# Allegro board VGroupV_PCB.brd
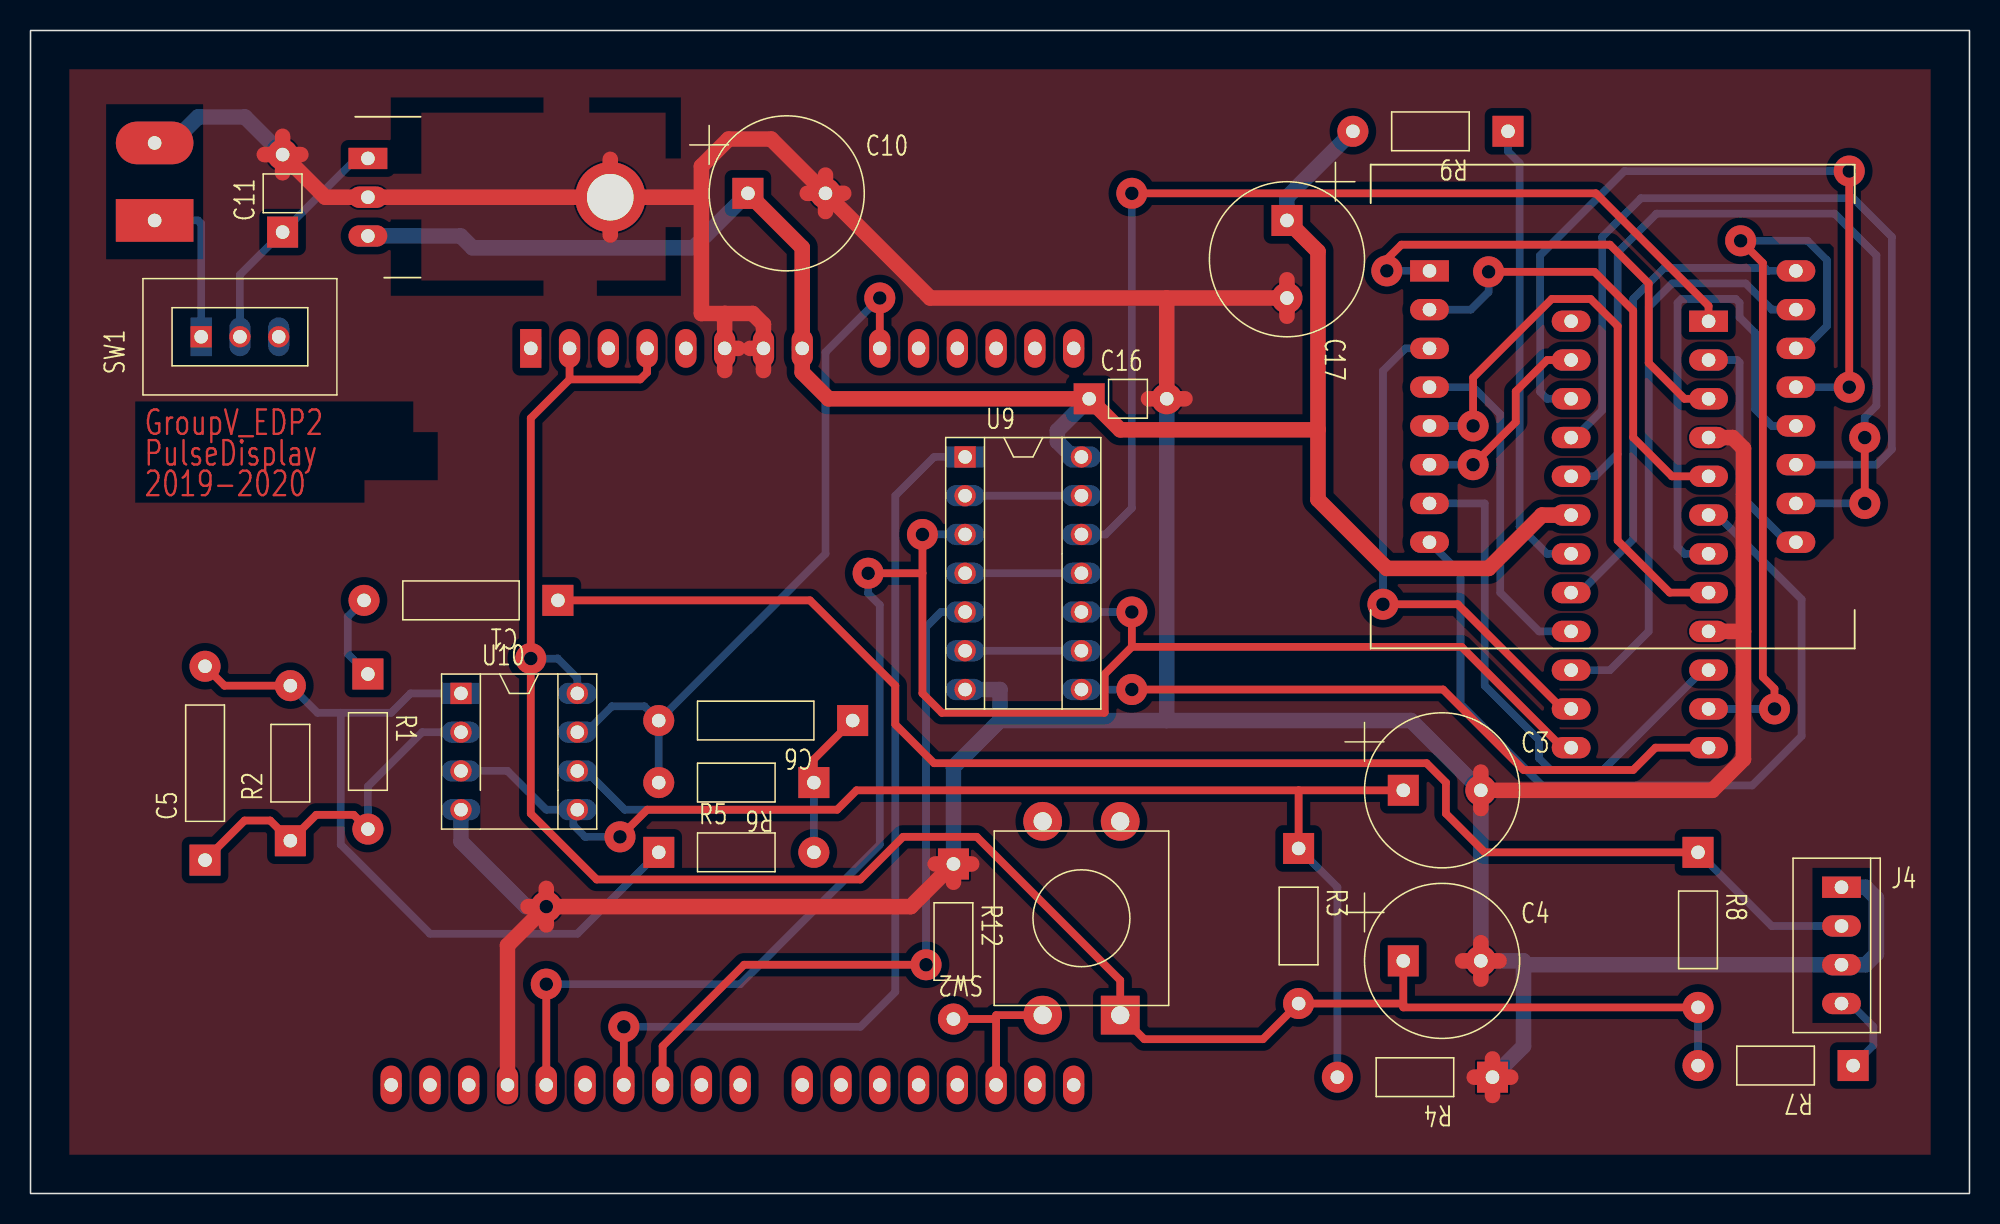
[diagram p0: board, top side]
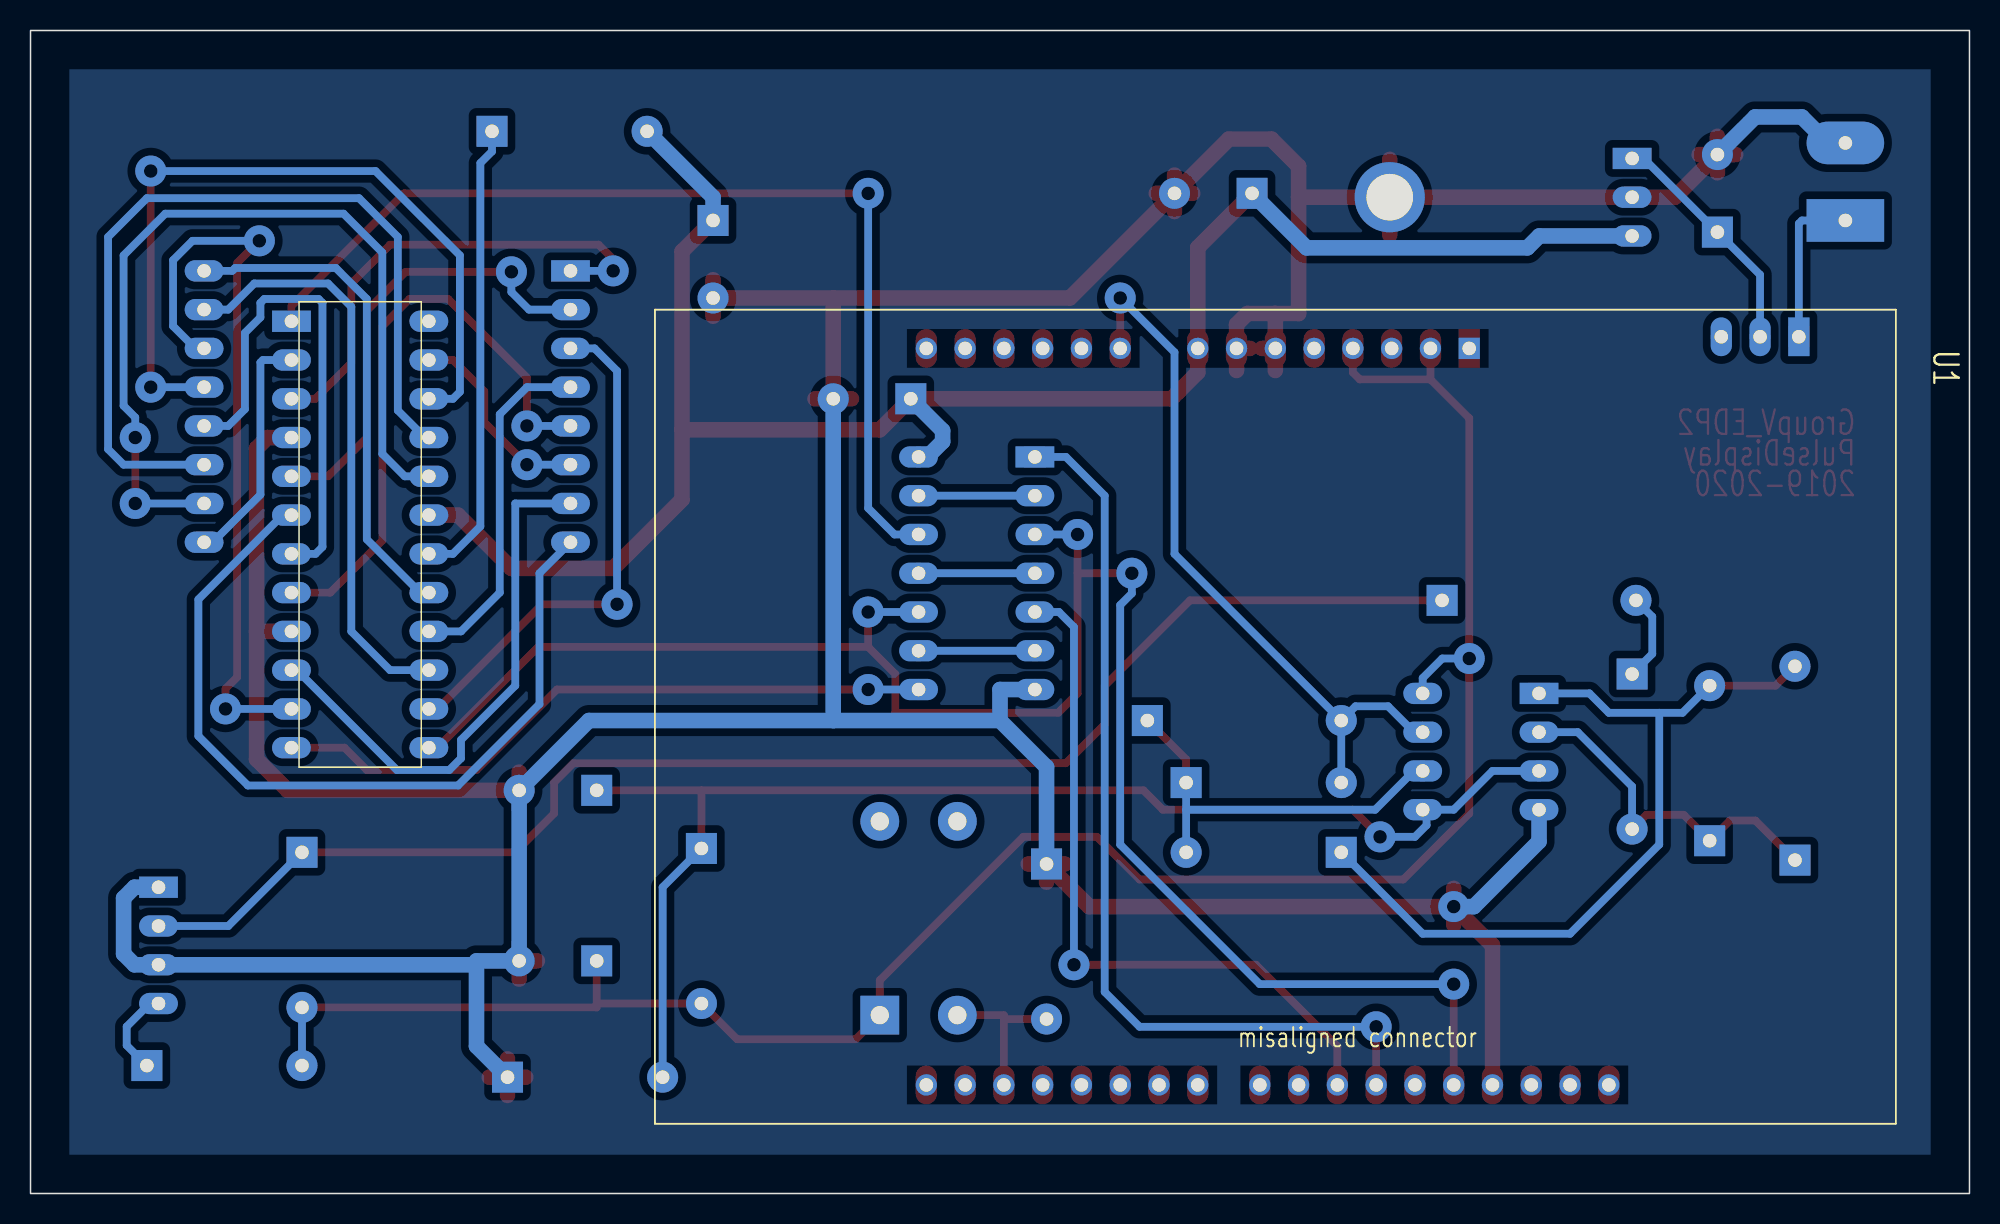
[diagram p1: board, bottom side, seen from below]

Outline 127 x 76.2 mm; copper layers: TOP, BOTTOM. Coordinates in mm from the lower left corner of the outline.
Outline path: rectangle 0,0 127,76.2

## Design rules (mm)
constraint set DEFAULT: min track width 0.508
nets with their own width: min track width 1.016; nets GND VCC

## Placement (name value [footprint] x y rotation side)
C1  1u  [GU-RC500]  34.54 38.86 180 top
C3  220U  [GU-CAPCYL200]  89.92 26.42 0 top
C4  220U  [GU-CAPCYL200]  89.92 15.24 0 top
C5  1n  [GU-RC500]  11.43 21.84 90 top
C6  1n  [GU-RC500]  53.85 30.99 180 top
C10  220u  [GU-CAPCYL200]  46.99 65.53 0 top
C11  0.1u  [GU-RC200]  16.51 62.99 90 top
C16  0.1u  [GU-RC200]  69.34 52.07 0 top
C17  10u  [GU-CAPCYL200]  82.3 63.75 270 top
DN1  LedArr-8x8  [8X8-LED-TRUOPTO]  103.63 51.56 270 top
J1  BATTERY 9V  [GU-TERMINAL2-200]  8.13 63.75 180 top
J4  CON4  [GU-MOLEX4]  118.62 20.07 0 top
R1  10k  [GU-RC400]  22.1 34.04 270 top
R2  50k  [GU-RC400]  17.02 23.11 90 top
R3  100k  [GU-RC400]  83.06 22.61 270 top
R4  100k  [GU-RC400]  95.76 7.62 180 top
R5  1k  [GU-RC400]  41.15 22.35 0 top
R6  50k  [GU-RC400]  51.31 26.92 180 top
R7  100  [GU-RC400]  119.38 8.38 180 top
R8  10k  [GU-RC400]  109.22 22.35 270 top
R9  30k  [GU-RC400]  96.77 69.6 180 top
R12  3k3  [GU-RC400]  60.45 21.59 270 top
SW1  SW_SL_SPDT  [GU-SW-SLIDE-SPDT]  11.18 56.13 90 top
SW2  SW PUSHBUTTON-SPST-2/SM  [GU-PUSH52]  71.37 11.68 180 top
U1  FRDM-KL25Z-Arduino  [GU-FRDM-ARDUINO]  32.77 55.37 270 bottom
U5  LM2937  [GU-LM2937]  22.1 67.82 0 top
U8  MAX7221  [GU-DIP24]  105.41 43.18 180 bottom
U9  74HCT04  [GU-DIPSOCK14]  61.21 48.26 0 top
U10  MCP6292  [GU-DIPSOCK8]  28.19 32.77 0 top

## Library data of the parts
C1 C5 C6 = C
C3 C4 = C_elect_0
C10 C11 C16 C17 = CAPACITOR NON-POL
DN1 = LedArr-8x8
J1 = CON2: User Part Number: TERMINAL2-200
J4 = CON4
R1-R9 R12 = R
SW1 = SW_SL_SPDT
SW2 = SW PUSHBUTTON-SPST-2/SM_1
U1 = FRDM-KL25Z-Arduino
U5 = LM2937_0
U8 = MAX7221_7
U9 = 74HCT04
U10 = MCP6292

## Footprints (pads in the part's own frame, mm; a bottom-side part is the same pattern mirrored in y, then rotated)
8X8-LED-TRUOPTO
  rect 1.397x2.54 hole 0.889: 1(-8.89,-12)
  oval 1.397x2.54 hole 0.889: 2(-6.35,-12) 3(-3.81,-12) 4(-1.27,-12) 5(1.27,-12) 6(3.81,-12) 7(6.35,-12) 8(8.89,-12) 9(8.89,12) 10(6.35,12) 11(3.81,12) 12(1.27,12) 13(-1.27,12) 14(-3.81,12) 15(-6.35,12) 16(-8.89,12)
GU-CAPCYL200
  rect 2.032x2.032 hole 0.889: 1(0,0)
  round 2.032 hole 0.889: 2(5.08,0)
GU-DIP24
  rect 2.54x1.397 hole 0.889: 1(-4.5,13.97)
  oval 2.54x1.397 hole 0.889: 2(-4.5,11.43) 3(-4.5,8.89) 4(-4.5,6.35) 5(-4.5,3.81) 6(-4.5,1.27) 7(-4.5,-1.27) 8(-4.5,-3.81) 9(-4.5,-6.35) 10(-4.5,-8.89) 11(-4.5,-11.43) 12(-4.5,-13.97) 13(4.5,-13.97) 14(4.5,-11.43) 15(4.5,-8.89) 16(4.5,-6.35) 17(4.5,-3.81) 18(4.5,-1.27) 19(4.5,1.27) 20(4.5,3.81) 21(4.5,6.35) 22(4.5,8.89) 23(4.5,11.43) 24(4.5,13.97)
GU-DIPSOCK8
  rect 1.397x1.397 hole 0.889: 1(0,0)
  round 1.397 hole 0.889: 2(0,-2.54) 3(0,-5.08) 4(0,-7.62) 5(7.62,-7.62) 6(7.62,-5.08) 7(7.62,-2.54) 8(7.62,0)
GU-DIPSOCK14
  rect 1.397x1.397 hole 0.889: 1(0,0)
  round 1.397 hole 0.889: 2(0,-2.54) 3(0,-5.08) 4(0,-7.62) 5(0,-10.16) 6(0,-12.7) 7(0,-15.24) 8(7.62,-15.24) 9(7.62,-12.7) 10(7.62,-10.16) 11(7.62,-7.62) 12(7.62,-5.08) 13(7.62,-2.54) 14(7.62,0)
GU-FRDM-ARDUINO
  rect 2.54x1.397 hole 0.889: 1(0,0)
  oval 2.54x1.397 hole 0.889: 2(0,-2.54) 3(0,-5.08) 4(0,-7.62) 5(0,-10.16) 6(0,-12.7) 7(0,-15.24) 8(0,-17.78) 9(0,-22.86) 10(0,-25.4) 11(0,-27.94) 12(0,-30.48) 13(0,-33.02) 14(0,-35.56) 15(48.26,-35.56) 16(48.26,-33.02) 17(48.26,-30.48) 18(48.26,-27.94) 19(48.26,-25.4) 20(48.26,-22.86) 21(48.26,-20.32) 22(48.26,-17.78) 23(48.26,-13.716) 24(48.26,-11.176) 25(48.26,-8.636) 26(48.26,-6.096) 27(48.26,-3.556) 28(48.26,-1.016) 29(48.26,1.524) 30(48.26,4.064) 31(48.26,6.604) 32(48.26,9.144)
GU-LM2937
  rect 2.54x1.397 hole 0.889: 1(0,0)
  oval 2.54x1.397 hole 0.889: 2(0,-2.54) 3(0,-5.08)
  round 4.6 hole 3.05: 4(15.875,-2.54)
GU-MOLEX4
  rect 2.54x1.397 hole 0.889: 1(0,0)
  oval 2.54x1.397 hole 0.889: 2(0,-2.54) 3(0,-5.08) 4(0,-7.62)
GU-PUSH52
  rect 2.54x2.54 hole 1.194: 1(0,0)
  round 2.54 hole 1.194: 2(5.08,0) 3(0,-12.7) 4(5.08,-12.7)
GU-RC200
  rect 2.032x2.032 hole 0.889: 1(0,0)
  round 2.032 hole 0.889: 2(5.08,0)
GU-RC400
  rect 2.032x2.032 hole 0.889: 1(0,0)
  round 2.032 hole 0.889: 2(10.16,0)
GU-RC500
  rect 2.032x2.032 hole 0.889: 1(0,0)
  round 2.032 hole 0.889: 2(12.7,0)
GU-SW-SLIDE-SPDT
  rect 1.397x1.397 hole 0.889: 1(0,0)
  round 1.397 hole 0.889: 2(0,-2.54) 3(0,-5.08)
GU-TERMINAL2-200
  rect 5.08x2.794 hole 0.889: 1(0,0)
  oval 5.08x2.794 hole 0.889: 2(0,-5.08)

## Nets
3V3: C4.1 R3.2 R7.2 R8.2 SW2.1(4) U1.2 U1.4 U10.8
GND: C3.2(-) C4.2(-) C10.2 C11.2 C16.2 C17.2 J1.2 J4.1 J4.3 R4.1 R12.1 U1.6 U1.7 U1.29 U5.2 U5.4 U8.4 U8.9 U9.7 U10.4
VCC: C10.1 C16.1 C17.1 R9.2 U1.8 U5.3(OUT) U8.19(VCC) U9.14
VIN: C1.1 J4.2 R8.1
CS: U8.12 U9.8
LOAD: U1.25 U9.5
MOSI: U1.26 U9.1
SCLK: U1.28 U8.13 U9.3 U9.10
SDI: U8.1 U9.12(Y)
VOUT: C6.2 R6.2 U1.9 U10.7(OUT)
VREF: C3.1 R3.1 R4.2 U10.3 U10.5
N08137: C5.1 R1.2 R2.1 U10.2
N08145: C5.2 R2.2 R5.1 U10.1
N08157: C6.1 R5.2 R6.1 U10.6
N08433: C1.2 R1.1
N10280: J4.4 R7.1
N13184: U9.4 U9.11
N13188: U9.2 U9.13
N13195: U9.6 U9.9
N25169: DN1.16 U8.17
N25451: DN1.13 U8.22
N25464: DN1.3 U8.14
N25471: DN1.4 U8.16
N25478: DN1.10 U8.20
N25485: DN1.6 U8.23
N25492: DN1.11 U8.21
N25499: DN1.15 U8.15
N28309: J1.1 SW1.1
N28319: C11.1 SW1.2 U5.1
N29244: R12.2 SW2.2 U1.17
N68469: R9.1 U8.18
N1135613: DN1.9 U8.2
N1135614: DN1.14 U8.11
N1135615: DN1.8 U8.6
N1135616: DN1.12 U8.7
N1135617: DN1.1 U8.3
N1135618: DN1.7 U8.10
N1135619: DN1.2 U8.5
N1135620: DN1.5(RA8) U8.8

Pads without a net: SW1 3; SW2 3 4; U1 1 3 5 10 11 12 13 14 15 16 18 19 20 21 22 23 24 27 30 31 32; U8 24

## Via types
v1: diameter 2.032, hole 0.889, TOP to BOTTOM, 23 vias

## Routing (per net, layer and track width the routed paths; a pad name or vN(x,y) marks a point on that pad's centre or on a via; arc(x,y) is an arc through that point)
3V3: length 137
  TOP w0.508: R8.2 89.92,12.19 89.92,12.45 ; 35.31,53.34 39.93,53.34 40.39,53.8 U1.4 ; 35.31,53.34 32.77,50.8 v1(32.77,35.05) 32.77,24.89 37.08,20.57 54.36,20.57 57.15,23.37 61.98,23.37 71.37,13.97 SW2.1 72.95,10.11 80.72,10.11 R3.2 89.92,12.45 ; 35.31,53.34 U1.2 ; C4.1 89.92,12.45
  BOTTOM w0.508: R7.2 R8.2 ; v1(32.77,35.05) 34.53,35.05 35.81,33.77 U10.8
GND: length 364.4
  TOP w1.016: C10.2 52.07,66.73 ; C10.2 50.88,65.53 ; C10.2 48.51,69.09 45.72,69.09 43.94,67.31 43.94,65.28 ; C10.2 58.93,58.67 74.42,58.67 ; C10.2 52.07,64.34 ; C10.2 53.26,65.53 ; U1.6 46.34,55.37 ; U1.6 45.47,57.66 ; U1.6 45.47,53.92 ; 45.47,57.66 43.94,57.66 43.94,65.28 ; 45.47,57.66 47.29,57.66 48.01,56.95 U1.7 ; C4.2 96.19,15.24 ; C4.2 95,16.43 ; C4.2 93.8,15.24 ; C4.2 95,14.05 ; R12.1 57.66,18.8 v1(33.78,18.8) ; R12.1 60.45,20.4 ; R12.1 59.26,21.59 ; R12.1 61.65,21.59 ; 112.2,36.83 112.2,28.45 110.16,26.42 C3.2 ; 112.2,36.83 112.2,48.82 111.48,49.53 U8.4 ; 112.2,36.83 U8.9 ; 32.59,18.8 v1(33.78,18.8) ; v1(33.78,18.8) 31.24,16.26 U1.29 ; v1(33.78,18.8) 33.78,19.99 ; v1(33.78,18.8) 33.78,17.6 ; 82.3,57.48 C17.2 ; C17.2 82.3,59.87 ; C17.2 74.42,58.67 ; 48.01,53.92 U1.7 ; U1.7 47.13,55.37 ; 43.94,65.28 U5.4 ; 74.42,58.67 C16.2 ; C3.2 95,27.61 ; C3.2 95,25.22 ; U5.4 U5.2 19.3,65.28 C11.2 ; U5.4 37.97,62.8 ; U5.4 37.97,67.76 ; C11.2 17.7,68.07 ; C11.2 15.32,68.07 ; C11.2 16.51,66.88 ; C11.2 16.51,69.27 ; R4.1 95.76,8.81 ; R4.1 96.95,7.62 ; R4.1 94.56,7.62 ; R4.1 95.76,6.43 ; C16.2 75.62,52.07 ; C16.2 73.23,52.07
  BOTTOM w1.016: 74.42,30.99 63.5,30.99 ; 74.42,30.99 C16.2 ; 74.42,30.99 90.42,30.99 C3.2 C4.2 97.79,15.24 97.79,14.99 ; 63.5,30.99 60.45,27.94 R12.1 ; 63.5,30.99 63.5,33.02 U9.7 ; 97.79,14.99 J4.3 120.19,14.99 120.9,15.7 120.9,19.35 120.19,20.07 J4.1 ; 97.79,14.99 97.79,9.65 R4.1 ; C11.2 14.05,70.54 10.97,70.54 9.27,68.83 J1.2 ; U10.4 28.19,23.06 32.46,18.8 v1(33.78,18.8)
VCC: length 127.6
  TOP w1.016: 84.33,50.04 71.37,50.04 C16.1 52.27,52.07 50.55,53.8 U1.8 50.55,61.98 C10.1 ; 84.33,50.04 84.33,45.47 88.84,40.96 95.5,40.96 99,44.45 U8.19 ; 84.33,50.04 84.33,61.72 C17.1
  BOTTOM w1.016: C17.1 82.3,65.28 R9.2 ; U5.3 28.18,62.74 28.96,61.96 43.42,61.96 C10.1 ; C16.1 67.26,49.99 67.26,49.26 68.26,48.26 U9.14
VIN: length 95.6
  TOP w0.508: R8.1 95.25,22.35 92.71,24.89 92.71,26.92 91.44,28.19 59.18,28.19 56.64,30.73 56.64,33.27 51.05,38.86 C1.1
  BOTTOM w0.508: R8.1 114.05,17.53 J4.2
CS: length 43.9
  TOP w0.508: U8.12 106.43,29.21 104.97,27.75 97.79,27.75 92.52,33.02 v1(72.14,33.02)
  BOTTOM w0.508: U9.8 v1(72.14,33.02)
LOAD: length 47.1
  TOP w0.508: v1(58.66,14.99) 46.74,14.99 41.4,9.65 U1.25
  BOTTOM w0.508: U9.5 59.64,38.1 58.66,37.12 v1(58.66,14.99)
MOSI: length 60.7
  TOP w0.508: U1.26 v1(38.86,10.92)
  BOTTOM w0.508: U9.1 59.18,48.26 56.64,45.72 56.64,13.21 54.36,10.92 v1(38.86,10.92)
SCLK: length 121.7
  TOP w0.508: 72.14,35.81 93.73,35.81 100.34,29.21 U8.13 ; 72.14,35.81 v1(72.14,38.1) ; 72.14,35.81 70.36,34.04 70.36,31.52 70.33,31.5 59.69,31.5 58.42,32.77 58.42,40.64 ; U1.28 v1(33.78,13.72) ; v1(54.86,40.64) 58.42,40.64 ; 58.42,40.64 v1(58.42,43.18)
  BOTTOM w0.508: v1(54.86,40.64) 54.86,39.32 55.63,38.56 55.63,22.86 46.48,13.72 v1(33.78,13.72) ; U9.10 v1(72.14,38.1) ; U9.3 v1(58.42,43.18)
SDI: length 66.5
  TOP w0.508: U8.1 109.91,58.15 102.53,65.53 v1(72.14,65.53)
  BOTTOM w0.508: v1(72.14,65.53) 72.14,44.91 70.41,43.18 U9.12
VOUT: length 47.5
  TOP w0.508: U1.9 v1(55.63,58.67)
  BOTTOM w0.508: C6.2 40.21,31.92 38.08,31.92 36.39,30.23 U10.7 ; C6.2 R6.2 ; C6.2 52.07,41.91 52.07,55.12 v1(55.63,58.67)
VREF: length 85.5
  TOP w0.508: v1(38.61,23.37) 40.39,25.15 52.83,25.15 54.1,26.42 83.06,26.42 ; 83.06,26.42 R3.1 ; 83.06,26.42 C3.1
  BOTTOM w0.508: 35.56,25.15 35.56,24.13 36.32,23.37 v1(38.61,23.37) ; 35.56,25.15 33.78,25.15 31.24,27.69 U10.3 ; 35.56,25.15 U10.5 ; R4.2 85.6,20.07 R3.1
N08137: length 23.7
  TOP w0.508: C5.1 14.02,24.44 15.7,24.44 R2.1 18.71,24.81 21.16,24.81 R1.2
  BOTTOM w0.508: U10.2 25.65,30.23 22.1,26.67 R1.2
N08145: length 52.6
  TOP w0.508: C5.2 12.7,33.27 R2.2
  BOTTOM w0.508: 20.32,31.5 18.8,31.5 R2.2 ; 20.32,31.5 23.62,31.5 24.89,32.77 U10.1 ; 20.32,31.5 20.32,22.86 26.16,17.02 35.81,17.02 R5.1
N08157: length 26.2
  TOP w0.508: R6.1 51.31,28.45 C6.1
  BOTTOM w0.508: 51.31,25.15 R5.2 ; 51.31,25.15 38.93,25.15 36.39,27.69 U10.6 ; 51.31,25.15 R6.1
N08433: length 5.8
  BOTTOM w0.508: C1.2 20.78,37.79 20.78,35.36 R1.1
N10280: length 5.8
  BOTTOM w0.508: R7.1 120.7,9.7 120.7,10.93 119.19,12.45 J4.4
N13184: length 7.6
  BOTTOM w0.508: U9.11 U9.4
N13188: length 7.6
  BOTTOM w0.508: U9.13 U9.2
N13195: length 7.6
  BOTTOM w0.508: U9.9 U9.6
N25169: length 32.8
  BOTTOM w0.508: DN1.16 113.79,60.45 113.6,60.64 107.01,60.64 104.97,58.61 104.97,42.86 101.48,39.37 U8.17
N25451: length 51.4
  TOP w0.508: v1(119.13,66.99) v1(119.13,52.83)
  BOTTOM w0.508: U8.22 99.34,52.07 98.88,52.53 98.88,61.47 104.4,66.99 v1(119.13,66.99) ; DN1.13 v1(119.13,52.83)
N25464: length 34.1
  TOP w0.508: U8.14 100.34,31.75 93.48,38.61 v1(88.58,38.61)
  BOTTOM w0.508: DN1.3 90.06,55.37 88.58,53.9 v1(88.58,38.61)
N25471: length 22.8
  BOTTOM w0.508: DN1.4 94.49,52.83 96.27,51.05 96.27,39.37 98.81,36.83 U8.16
N25478: length 57.1
  TOP w0.508: v1(120.14,49.53) v1(120.14,45.21)
  BOTTOM w0.508: U8.20 102.48,46.99 103.96,48.46 103.96,61.66 106.5,64.2 118.17,64.2 120.9,61.47 120.9,51.61 120.14,50.85 v1(120.14,49.53) ; DN1.10 v1(120.14,45.21)
N25485: length 13.3
  TOP w0.508: U8.23 99.34,54.61 97.28,52.56 97.28,50.55 v1(94.49,47.75)
  BOTTOM w0.508: DN1.6 v1(94.49,47.75)
N25492: length 55.8
  BOTTOM w0.508: U8.21 101.16,49.53 102.94,51.31 102.94,62.67 105.48,65.21 119.38,65.21 121.92,62.67 121.92,48.77 120.9,47.75 DN1.11
N25499: length 38.4
  BOTTOM w0.508: DN1.15 114.06,57.91 112.34,59.63 107.51,59.63 105.99,58.1 105.99,36.83 103.45,34.29 U8.15
N28309: length 10.5
  BOTTOM w0.508: SW1.1 11.18,63.55 10.97,63.75 J1.1
N28319: length 15.6
  BOTTOM w0.508: SW1.2 13.72,60.2 C11.1 21.34,67.82 U5.1
N29244: length 10.4
  TOP w0.508: SW2.2 63.25,11.68 63.25,11.43 ; R12.2 63.25,11.43 ; 63.25,11.43 U1.17
N68469: length 30.3
  BOTTOM w0.508: U8.18 99.34,41.91 97.54,43.71 97.54,67.51 96.77,68.28 R9.1
N1135613: length 15.7
  BOTTOM w0.508: DN1.9 115.06,42.67 111.94,45.79 111.94,54.45 111.78,54.61 U8.2
N1135614: length 49
  TOP w0.508: v1(114.23,31.75) 114.23,33.07 113.47,33.83 113.47,60.97 v1(112.01,62.42)
  BOTTOM w0.508: DN1.14 116.2,55.37 117.66,56.83 117.66,61.15 116.39,62.42 v1(112.01,62.42) ; U8.11 v1(114.23,31.75)
N1135615: length 54.7
  BOTTOM w0.508: U8.6 110.48,44.45 116.01,38.93 116.01,29.97 112.77,26.73 99,26.73 93.66,32.07 93.66,40.64 DN1.8
N1135616: length 33
  BOTTOM w0.508: DN1.12 114.06,50.29 112.96,51.39 112.96,56.39 111.94,57.4 111.94,58.36 111.69,58.61 108.13,58.61 107.88,58.36 107.88,42.37 108.34,41.91 U8.7
N1135617: length 32.3
  TOP w0.508: U8.3 108.34,52.07 105.99,54.42 105.99,59.63 103.45,62.17 89.79,62.17 88.84,61.21 v1(88.84,60.45)
  BOTTOM w0.508: DN1.1 v1(88.84,60.45)
N1135618: length 35.9
  BOTTOM w0.508: DN1.7 95.25,45.21 95.25,33.27 98.81,29.72 98.81,28.51 99.57,27.75 103.01,27.75 109.55,34.29 U8.10
N1135619: length 30.5
  TOP w0.508: v1(95.5,60.39) 102.43,60.39 104.97,57.85 104.97,49.53 107.51,46.99 U8.5
  BOTTOM w0.508: v1(95.5,60.39) 95.5,59.07 94.35,57.91 DN1.2
N1135620: length 39.8
  TOP w0.508: v1(94.49,50.29) 94.49,53.46 99.64,58.61 102.18,58.61 103.96,56.83 103.96,42.78 107.37,39.37 U8.8
  BOTTOM w0.508: DN1.5 v1(94.49,50.29)

## Copper pours and planes (outline as drawn; the poured copper is in the pictures)
GND on TOP: 2.54,73.66 124.46,73.66 124.46,2.54 2.54,2.54 ; 6 cut-outs
Net_1 on BOTTOM: 2.54,73.66 124.46,73.66 124.46,2.54 2.54,2.54

## Text on the board
TOP: GroupV_EDP2 | PulseDisplay | 2019-2020
